# Altium PCB ROW.PcbDoc (part 3 of 3)
Units mm, origin at the board's own origin, x right, y up, seen from the top; angles counter-clockwise.
Board outline 176.65 x 110.9 mm, 2 copper layers (Top Layer, Bottom Layer); 156 components, 298 nets, 1223 pads, 409 vias.
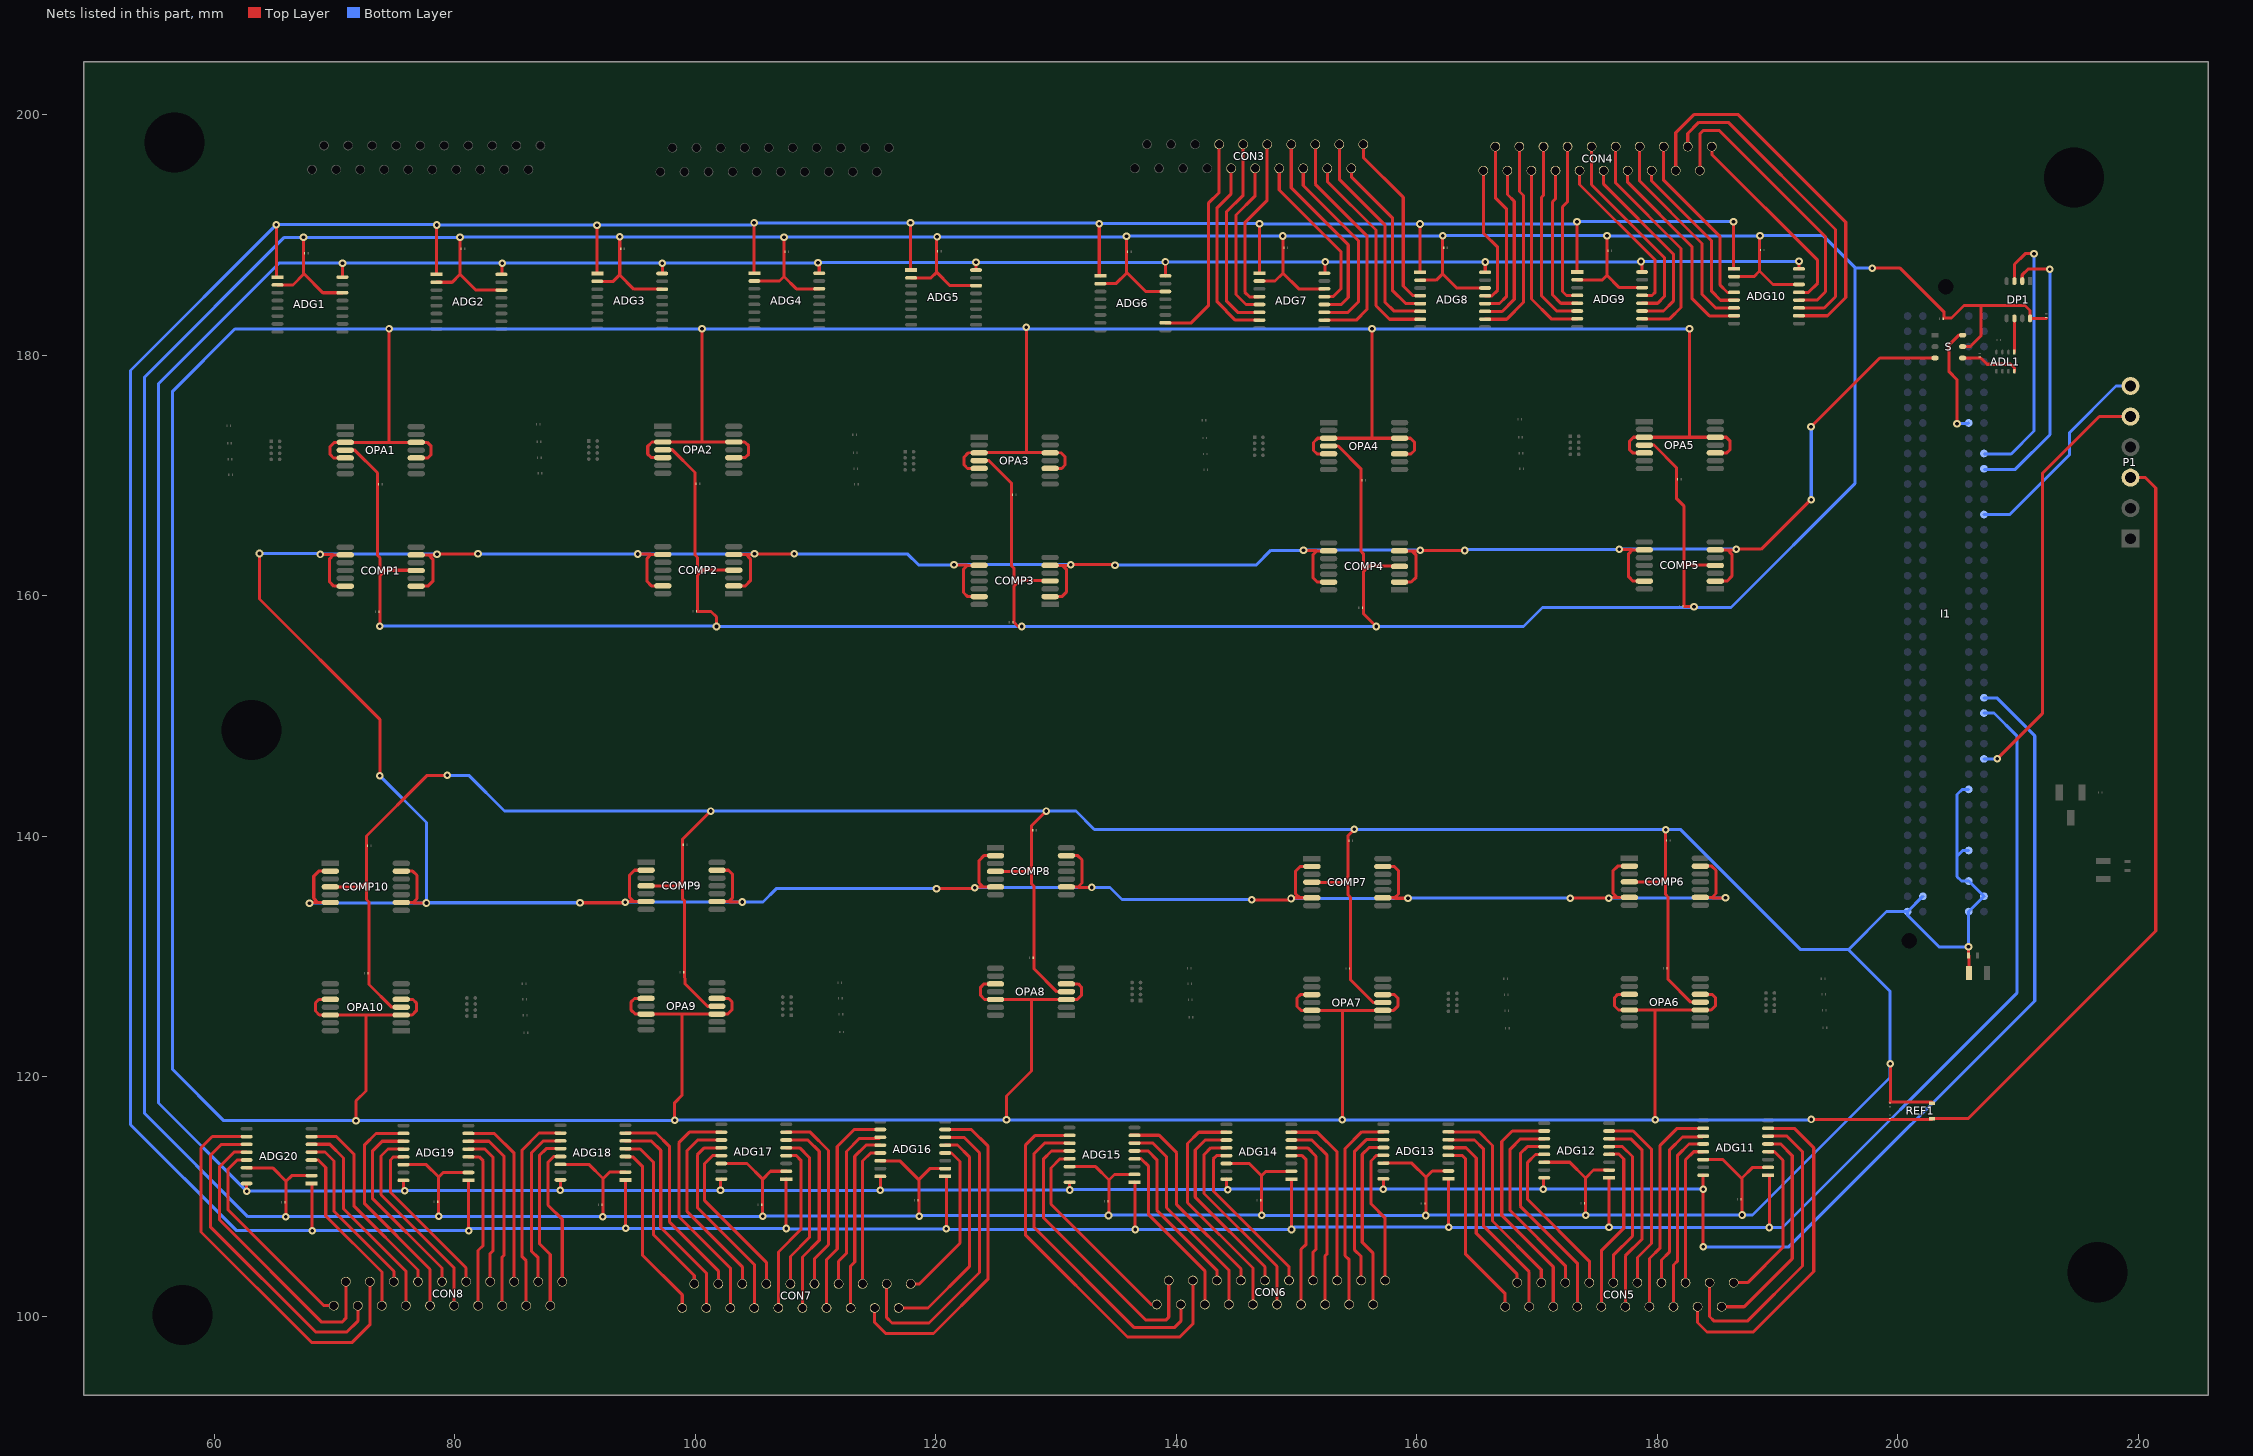
[diagram p3: the nets of this part, all layers, seen from the top]

## Via types
v1: diameter 0.635, hole 0.305, Top Layer to Bottom Layer, 409 vias

## Nets (pads, with @x,y where several pads share a name; then routed paths per layer and width w, separated by ;. In a path a pad name is that pad's centre, name@x,y a point inside that pad or via, vN(x,y) a via of type N, cw(c..) or ccw(c..) an arc to the next point about the centre after c; other vN are vias at no path point) (continued)
R48: ADG6.10 CON3.8 | length 18
  Top Layer w0.254: ADG6.10@139.084,182.684 141.248,182.684 142.664,184.1 142.664,192.622 143.555,193.513 CON3.8@143.555,197.525
R49: ADG7.7 CON3.9 | length 15.7
  Top Layer w0.254: CON3.9@144.555,195.525 144.555,193.422 143.391,192.258 143.391,184.424 144.909,182.906 ADG7.7@146.905,182.906
R50: ADG7.6 CON3.10 | length 16.7
  Top Layer w0.254: CON3.10@145.555,197.525 145.555,193.292 144.158,191.895 144.158,184.504 145.106,183.556 ADG7.6@146.905,183.556
R51: ADG7.5 CON3.11 | length 13.4
  Top Layer w0.254: CON3.11@146.555,195.525 146.555,193.241 144.966,191.652 144.966,185.029 145.789,184.206 ADG7.5@146.905,184.206
R52: ADG7.4 CON3.12 | length 14.5
  Top Layer w0.254: ADG7.4@146.905,184.856 146.876,184.827 146.097,184.827 145.693,185.231 145.693,191.006 147.555,192.868 CON3.12@147.555,197.525
R53: ADG7.13 CON3.13 | length 13.8
  Top Layer w0.254: CON3.13@148.555,195.525 148.555,193.734 153.689,188.6 153.689,185.514 153.031,184.856 ADG7.13@152.305,184.856
R54: ADG7.12 CON3.14 | length 16.9
  Top Layer w0.254: CON3.14@149.555,197.525 149.555,193.902 154.295,189.162 154.295,184.786 153.715,184.206 ADG7.12@152.305,184.206
R55: ADG7.11 CON3.15 | length 16.2
  Top Layer w0.254: CON3.15@150.555,195.525 150.555,194.104 155.143,189.516 155.143,184.423 154.276,183.556 ADG7.11@152.305,183.556
R56: ADG7.10 CON3.16 | length 19.4
  Top Layer w0.254: CON3.16@151.555,197.525 151.555,194.209 155.84,189.924 155.84,183.787 154.959,182.906 ADG7.10@152.305,182.906
R57: ADG8.7 CON3.17 | length 17.2
  Top Layer w0.254: CON3.17@152.555,195.525 152.555,194.442 156.604,190.393 156.604,184.106 157.73,182.98 ADG8.7@160.28,182.98
R58: ADG8.6 CON3.18 | length 18
  Top Layer w0.254: CON3.18@153.555,197.525 153.555,194.616 157.34,190.831 157.34,184.42 158.109,183.651 ADG8.6@160.28,183.651 ; ADG8.6@160.259,183.651 ADG8.6@160.28,183.63
R59: ADG8.5 CON3.19 | length 14.3
  Top Layer w0.254: CON3.19@154.555,195.525 154.555,194.825 157.96,191.42 157.96,185.39 159.049,184.301 160.259,184.301 ADG8.5@160.28,184.28
R60: ADG8.4 CON3.20 | length 14.9
  Top Layer w0.254: CON3.20@155.555,197.525 155.555,196.435 158.87,193.12 158.87,185.74 159.659,184.951 ADG8.4@160.28,184.951 ; ADG8.4@160.259,184.951 ADG8.4@160.28,184.93
R61: ADG8.13 CON4.1 | length 11.7
  Top Layer w0.254: CON4.1@165.532,195.338 165.532,190.158 166.72,188.97 166.72,185.4 166.25,184.93 ADG8.13@165.68,184.93
R62: ADG8.12 CON4.2 | length 14.9
  Top Layer w0.254: ADG8.12@165.68,184.28 166.87,184.28 167.44,184.85 167.44,192.17 166.532,193.078 CON4.2@166.532,197.338
R63: ADG8.11 CON4.3 | length 13.8
  Top Layer w0.254: ADG8.11@165.68,183.63 167.1,183.63 168.1,184.63 168.1,192.78 167.532,193.348 CON4.3@167.532,195.338
R64: ADG8.10 CON4.4 | length 16.9
  Top Layer w0.254: ADG8.10@165.68,182.98 167.47,182.98 168.87,184.38 168.87,193.27 168.532,193.608 CON4.4@168.532,197.338
R65: ADG9.7 CON4.5 | length 15.2
  Top Layer w0.254: CON4.5@169.532,195.338 169.532,184.658 171.18,183.01 ADG9.7@173.34,183.01
R66: ADG9.6 CON4.6 | length 16
  Top Layer w0.254: CON4.6@170.532,197.338 170.532,193.292 170.36,193.12 170.36,184.93 171.63,183.66 ADG9.6@173.34,183.66
R67: ADG9.5 CON4.7 | length 12.8
  Top Layer w0.254: CON4.7@171.532,195.338 171.532,192.992 171.28,192.74 171.28,185.01 171.98,184.31 ADG9.5@173.34,184.31
R68: ADG9.4 CON4.8 | length 13.6
  Top Layer w0.254: CON4.8@172.532,197.338 172.532,192.752 172.11,192.33 172.11,185.29 172.44,184.96 ADG9.4@173.34,184.96
R69: ADG9.13 CON4.9 | length 13.9
  Top Layer w0.254: CON4.9@173.532,195.338 173.532,194.188 179.82,187.9 179.82,185.22 179.56,184.96 ADG9.13@178.74,184.96
R70: ADG9.12 CON4.10 | length 17.1
  Top Layer w0.254: CON4.10@174.532,197.338 174.532,194.168 180.6,188.1 180.6,184.88 180.03,184.31 ADG9.12@178.74,184.31
R71: ADG9.11 CON4.11 | length 16.2
  Top Layer w0.254: CON4.11@175.532,195.338 175.532,194.208 181.33,188.41 181.33,184.48 180.51,183.66 ADG9.11@178.74,183.66
R72: ADG9.10 CON4.12 | length 19.3
  Top Layer w0.254: CON4.12@176.532,197.338 176.532,194.308 181.97,188.87 181.97,183.95 181.03,183.01 ADG9.10@178.74,183.01
R73: ADG10.7 CON4.13 | length 17.3
  Top Layer w0.254: CON4.13@177.532,195.338 177.532,194.368 182.87,189.03 182.87,184.72 184.33,183.26 ADG10.7@186.71,183.26
R74: ADG10.6 CON4.14 | length 17.9
  Top Layer w0.254: CON4.14@178.532,197.338 178.532,194.468 183.72,189.28 183.72,185.05 184.86,183.91 ADG10.6@186.71,183.91
R75: ADG10.5 CON4.15 | length 14.6
  Top Layer w0.254: CON4.15@179.532,195.338 179.532,194.478 184.52,189.49 184.52,185.3 185.26,184.56 ADG10.5@186.71,184.56
R76: ADG10.4 CON4.16 | length 15.2
  Top Layer w0.254: CON4.16@180.532,197.338 180.532,194.538 185.2,189.87 185.2,185.85 185.84,185.21 ADG10.4@186.71,185.21
R77: ADG10.10 CON4.17 | length 32.4
  Top Layer w0.254: CON4.17@181.532,195.338 181.532,198.492 183.032,199.992 186.728,199.992 195.67,191.05 195.67,184.78 194.16,183.27 ADG10.10@191.78,183.27
R78: ADG10.11 CON4.18 | length 26.4
  Top Layer w0.254: CON4.18@182.532,197.338 182.532,198.432 183.45,199.35 185.91,199.35 194.81,190.45 194.81,184.86 193.87,183.92 ADG10.11@191.78,183.92
R79: ADG10.12 CON4.19 | length 24.3
  Top Layer w0.254: CON4.19@183.532,195.338 183.532,198.392 183.81,198.67 185.16,198.67 193.98,189.85 193.98,185.27 193.28,184.57 ADG10.12@191.78,184.57
R80: ADG10.13 CON4.20 | length 16.9
  Top Layer w0.254: CON4.20@184.532,197.338 184.532,196.678 193.33,187.88 193.33,185.98 192.57,185.22 ADG10.13@191.78,185.22
R81: ADG11.4 CON5.1 | length 14.1
  Top Layer w0.254: CON5.1@186.345,102.85 187.513,102.85 190.454,105.791 190.454,113.03 189.743,113.741 ADG11.4@189.216,113.741
R82: ADG11.5 CON5.2 | length 18.5
  Top Layer w0.254: CON5.2@185.345,100.85 187.218,100.85 191.221,104.853 191.221,113.416 190.241,114.396 189.221,114.396 ADG11.5@189.216,114.391
R83: ADG11.6 CON5.3 | length 25.5
  Top Layer w0.254: CON5.3@184.345,102.85 184.345,100.041 184.736,99.65 187.48,99.65 192.067,104.237 192.067,113.754 190.78,115.041 ADG11.6@189.216,115.041
R84: ADG11.7 CON5.4 | length 28.1
  Top Layer w0.254: CON5.4@183.345,100.85 183.345,99.539 184.134,98.75 187.98,98.75 193.01,103.78 193.01,114.067 191.386,115.691 ADG11.7@189.216,115.691
R85: ADG11.13 CON5.5 | length 12
  Top Layer w0.254: CON5.5@182.345,102.85 182.345,113.065 183.021,113.741 ADG11.13@183.816,113.741
R86: ADG11.12 CON5.6 | length 15.3
  Top Layer w0.254: CON5.6@181.345,100.85 181.345,104.329 181.694,104.678 181.694,113.458 182.627,114.391 ADG11.12@183.816,114.391
R87: ADG11.11 CON5.7 | length 14.6
  Top Layer w0.254: CON5.7@180.345,102.85 180.345,104.732 181.003,105.39 181.003,113.87 182.094,114.961 183.736,114.961 ADG11.11@183.816,115.041
R88: ADG11.10 CON5.8 | length 18
  Top Layer w0.254: CON5.8@179.345,100.85 179.345,104.862 180.236,105.753 180.236,114.275 181.652,115.691 ADG11.10@183.816,115.691
R89: ADG12.7 CON5.9 | length 15.7
  Top Layer w0.254: ADG12.7@175.995,115.469 177.991,115.469 179.509,113.951 179.509,106.117 178.345,104.953 CON5.9@178.345,102.85
R90: ADG12.6 CON5.10 | length 16.7
  Top Layer w0.254: ADG12.6@175.995,114.819 177.794,114.819 178.742,113.871 178.742,106.48 177.345,105.083 CON5.10@177.345,100.85
R91: ADG12.5 CON5.11 | length 13.4
  Top Layer w0.254: ADG12.5@175.995,114.169 177.111,114.169 177.934,113.346 177.934,106.723 176.345,105.134 CON5.11@176.345,102.85
R92: ADG12.4 CON5.12 | length 14.5
  Top Layer w0.254: CON5.12@175.345,100.85 175.345,105.507 177.207,107.369 177.207,113.144 176.803,113.548 176.024,113.548 ADG12.4@175.995,113.519
R93: ADG12.13 CON5.13 | length 13.8
  Top Layer w0.254: ADG12.13@170.595,113.519 169.869,113.519 169.211,112.861 169.211,109.775 174.345,104.641 CON5.13@174.345,102.85
R94: ADG12.12 CON5.14 | length 16.9
  Top Layer w0.254: ADG12.12@170.595,114.169 169.185,114.169 168.605,113.589 168.605,109.213 173.345,104.473 CON5.14@173.345,100.85
R95: ADG12.11 CON5.15 | length 16.2
  Top Layer w0.254: ADG12.11@170.595,114.819 168.624,114.819 167.757,113.952 167.757,108.859 172.345,104.271 CON5.15@172.345,102.85
R96: ADG12.10 CON5.16 | length 19.4
  Top Layer w0.254: ADG12.10@170.595,115.469 167.941,115.469 167.06,114.588 167.06,108.451 171.345,104.166 CON5.16@171.345,100.85
R97: ADG13.7 CON5.17 | length 17.2
  Top Layer w0.254: ADG13.7@162.62,115.395 165.17,115.395 166.296,114.269 166.296,107.982 170.345,103.933 CON5.17@170.345,102.85
R98: ADG13.6 CON5.18 | length 18
  Top Layer w0.254: ADG13.6@162.62,114.724 164.791,114.724 165.56,113.955 165.56,107.544 169.345,103.759 CON5.18@169.345,100.85 ; ADG13.6@162.62,114.745 ADG13.6@162.641,114.724
R99: ADG13.5 CON5.19 | length 14.5
  Top Layer w0.254: ADG13.5@162.62,114.095 162.641,114.074 164.091,114.074 164.94,113.225 164.94,106.955 168.345,103.55 CON5.19@168.345,102.85
R100: ADG13.4 CON5.20 | length 15.2
  Top Layer w0.254: ADG13.4@162.62,113.424 163.781,113.424 164.03,113.175 164.03,105.255 167.345,101.94 CON5.20@167.345,100.85 ; ADG13.4@162.62,113.445 ADG13.4@162.641,113.424
R101: ADG13.13 CON6.1 | length 11.7
  Top Layer w0.254: ADG13.13@157.22,113.445 156.65,113.445 156.18,112.975 156.18,109.405 157.368,108.217 CON6.1@157.368,103.037
R102: ADG13.12 CON6.2 | length 14.9
  Top Layer w0.254: CON6.2@156.368,101.037 156.368,105.297 155.46,106.205 155.46,113.525 156.03,114.095 ADG13.12@157.22,114.095
R103: ADG13.11 CON6.3 | length 13.8
  Top Layer w0.254: CON6.3@155.368,103.037 155.368,105.027 154.8,105.595 154.8,113.745 155.8,114.745 ADG13.11@157.22,114.745
R104: ADG13.10 CON6.4 | length 16.9
  Top Layer w0.254: CON6.4@154.368,101.037 154.368,104.767 154.03,105.105 154.03,113.995 155.43,115.395 ADG13.10@157.22,115.395
R105: ADG14.7 CON6.5 | length 15.2
  Top Layer w0.254: ADG14.7@149.56,115.365 151.72,115.365 153.368,113.717 CON6.5@153.368,103.037
R106: ADG14.6 CON6.6 | length 16
  Top Layer w0.254: ADG14.6@149.56,114.715 151.27,114.715 152.54,113.445 152.54,105.255 152.368,105.083 CON6.6@152.368,101.037
R107: ADG14.5 CON6.7 | length 12.8
  Top Layer w0.254: ADG14.5@149.56,114.065 150.92,114.065 151.62,113.365 151.62,105.635 151.368,105.383 CON6.7@151.368,103.037
R108: ADG14.4 CON6.8 | length 13.6
  Top Layer w0.254: ADG14.4@149.56,113.415 150.46,113.415 150.79,113.085 150.79,106.045 150.368,105.623 CON6.8@150.368,101.037
R109: ADG14.13 CON6.9 | length 13.9
  Top Layer w0.254: ADG14.13@144.16,113.415 143.34,113.415 143.08,113.155 143.08,110.475 149.368,104.187 CON6.9@149.368,103.037
R110: ADG14.12 CON6.10 | length 17.1
  Top Layer w0.254: ADG14.12@144.16,114.065 142.87,114.065 142.3,113.495 142.3,110.275 148.368,104.207 CON6.10@148.368,101.037
R111: ADG14.11 CON6.11 | length 16.2
  Top Layer w0.254: ADG14.11@144.16,114.715 142.39,114.715 141.57,113.895 141.57,109.965 147.368,104.167 CON6.11@147.368,103.037
R112: ADG14.10 CON6.12 | length 19.3
  Top Layer w0.254: ADG14.10@144.16,115.365 141.87,115.365 140.93,114.425 140.93,109.505 146.368,104.067 CON6.12@146.368,101.037
R113: ADG15.7 CON6.13 | length 17.3
  Top Layer w0.254: ADG15.7@136.19,115.115 138.57,115.115 140.03,113.655 140.03,109.345 145.368,104.007 CON6.13@145.368,103.037
R114: ADG15.6 CON6.14 | length 17.9
  Top Layer w0.254: ADG15.6@136.19,114.465 138.04,114.465 139.18,113.325 139.18,109.095 144.368,103.907 CON6.14@144.368,101.037
R115: ADG15.5 CON6.15 | length 14.6
  Top Layer w0.254: ADG15.5@136.19,113.815 137.64,113.815 138.38,113.075 138.38,108.885 143.368,103.897 CON6.15@143.368,103.037
R116: ADG15.4 CON6.16 | length 15.2
  Top Layer w0.254: ADG15.4@136.19,113.165 137.06,113.165 137.7,112.525 137.7,108.505 142.368,103.837 CON6.16@142.368,101.037
R117: ADG15.10 CON6.17 | length 33
  Top Layer w0.254: ADG15.10@131.12,115.105 128.27,115.105 127.44,114.275 127.44,106.83 135.93,98.34 140.29,98.34 141.368,99.418 CON6.17@141.368,103.037
R118: ADG15.11 CON6.18 | length 26.7
  Top Layer w0.254: ADG15.11@131.12,114.455 129.03,114.455 128.16,113.585 128.16,107.46 136.51,99.11 139.83,99.11 140.368,99.648 CON6.18@140.368,101.037
R119: ADG15.12 CON6.19 | length 24.4
  Top Layer w0.254: ADG15.12@131.12,113.805 129.62,113.805 128.94,113.125 128.94,108.28 137.48,99.74 139.125,99.74 139.368,99.983 CON6.19@139.368,103.037
R120: ADG15.13 CON6.20 | length 17.1
  Top Layer w0.254: ADG15.13@131.12,113.155 130.33,113.155 129.57,112.395 129.57,109.38 137.913,101.037 CON6.20@138.368,101.037
R121: ADG16.4 CON7.1 | length 13.8
  Top Layer w0.254: CON7.1@117.905,102.75 118.625,102.75 122.014,106.139 122.014,112.93 121.303,113.641 ADG16.4@120.776,113.641
R122: ADG16.5 CON7.2 | length 18.8
  Top Layer w0.254: CON7.2@116.905,100.75 119.35,100.75 122.781,104.181 122.781,113.316 121.801,114.296 120.781,114.296 ADG16.5@120.776,114.291
R123: ADG16.6 CON7.3 | length 25.8
  Top Layer w0.254: CON7.3@115.905,102.75 115.905,99.941 116.346,99.5 119.43,99.5 123.627,103.697 123.627,113.654 122.34,114.941 ADG16.6@120.776,114.941
R124: ADG16.7 CON7.4 | length 28.1
  Top Layer w0.254: CON7.4@114.905,100.75 114.905,99.545 115.825,98.625 119.8,98.625 124.35,103.175 124.35,114.187 122.946,115.591 ADG16.7@120.776,115.591
R125: ADG16.13 CON7.5 | length 12
  Top Layer w0.254: CON7.5@113.905,102.75 113.905,112.965 114.581,113.641 ADG16.13@115.376,113.641
R126: ADG16.12 CON7.6 | length 15.3
  Top Layer w0.254: CON7.6@112.905,100.75 112.905,104.229 113.254,104.578 113.254,113.358 114.187,114.291 ADG16.12@115.376,114.291
R127: ADG16.11 CON7.7 | length 14.6
  Top Layer w0.254: CON7.7@111.905,102.75 111.905,104.632 112.563,105.29 112.563,113.77 113.654,114.861 115.296,114.861 ADG16.11@115.376,114.941
R128: ADG16.10 CON7.8 | length 18
  Top Layer w0.254: CON7.8@110.905,100.75 110.905,104.762 111.796,105.653 111.796,114.175 113.212,115.591 ADG16.10@115.376,115.591
R129: ADG17.7 CON7.9 | length 15.7
  Top Layer w0.254: ADG17.7@107.555,115.369 109.551,115.369 111.069,113.851 111.069,106.017 109.905,104.853 CON7.9@109.905,102.75
R130: ADG17.6 CON7.10 | length 16.7
  Top Layer w0.254: ADG17.6@107.555,114.719 109.354,114.719 110.302,113.771 110.302,106.38 108.905,104.983 CON7.10@108.905,100.75
R131: ADG17.5 CON7.11 | length 13.4
  Top Layer w0.254: ADG17.5@107.555,114.069 108.671,114.069 109.494,113.246 109.494,106.623 107.905,105.034 CON7.11@107.905,102.75
R132: ADG17.4 CON7.12 | length 14.5
  Top Layer w0.254: CON7.12@106.905,100.75 106.905,105.407 108.767,107.269 108.767,113.044 108.363,113.448 107.584,113.448 ADG17.4@107.555,113.419
R133: ADG17.13 CON7.13 | length 13.8
  Top Layer w0.254: ADG17.13@102.155,113.419 101.429,113.419 100.771,112.761 100.771,109.675 105.905,104.541 CON7.13@105.905,102.75
R134: ADG17.12 CON7.14 | length 16.9
  Top Layer w0.254: ADG17.12@102.155,114.069 100.745,114.069 100.165,113.489 100.165,109.113 104.905,104.373 CON7.14@104.905,100.75
R135: ADG17.11 CON7.15 | length 16.2
  Top Layer w0.254: ADG17.11@102.155,114.719 100.184,114.719 99.317,113.852 99.317,108.759 103.905,104.171 CON7.15@103.905,102.75
R136: ADG17.10 CON7.16 | length 19.4
  Top Layer w0.254: ADG17.10@102.155,115.369 99.501,115.369 98.62,114.488 98.62,108.351 102.905,104.066 CON7.16@102.905,100.75
R137: ADG18.7 CON7.17 | length 17.2
  Top Layer w0.254: ADG18.7@94.18,115.295 96.73,115.295 97.856,114.169 97.856,107.882 101.905,103.833 CON7.17@101.905,102.75
R138: ADG18.6 CON7.18 | length 18
  Top Layer w0.254: ADG18.6@94.18,114.624 96.351,114.624 97.12,113.855 97.12,107.444 100.905,103.659 CON7.18@100.905,100.75 ; ADG18.6@94.18,114.645 ADG18.6@94.201,114.624
R139: ADG18.5 CON7.19 | length 14.3
  Top Layer w0.254: ADG18.5@94.18,113.995 94.201,113.974 95.411,113.974 96.5,112.885 96.5,106.855 99.905,103.45 CON7.19@99.905,102.75
R140: ADG18.4 CON7.20 | length 14.9
  Top Layer w0.254: ADG18.4@94.18,113.324 94.801,113.324 95.59,112.535 95.59,105.155 98.905,101.84 CON7.20@98.905,100.75 ; ADG18.4@94.18,113.345 ADG18.4@94.201,113.324
R141: ADG18.13 CON8.1 | length 11.7
  Top Layer w0.254: ADG18.13@88.78,113.345 88.21,113.345 87.74,112.875 87.74,109.305 88.928,108.117 CON8.1@88.928,102.937
R142: ADG18.12 CON8.2 | length 14.9
  Top Layer w0.254: CON8.2@87.928,100.937 87.928,105.197 87.02,106.105 87.02,113.425 87.59,113.995 ADG18.12@88.78,113.995
R143: ADG18.11 CON8.3 | length 13.8
  Top Layer w0.254: CON8.3@86.928,102.937 86.928,104.927 86.36,105.495 86.36,113.645 87.36,114.645 ADG18.11@88.78,114.645
R144: ADG18.10 CON8.4 | length 16.9
  Top Layer w0.254: CON8.4@85.928,100.937 85.928,104.667 85.59,105.005 85.59,113.895 86.99,115.295 ADG18.10@88.78,115.295
R145: ADG19.7 CON8.5 | length 15.2
  Top Layer w0.254: ADG19.7@81.12,115.265 83.28,115.265 84.928,113.617 CON8.5@84.928,102.937
R146: ADG19.6 CON8.6 | length 16
  Top Layer w0.254: ADG19.6@81.12,114.615 82.83,114.615 84.1,113.345 84.1,105.155 83.928,104.983 CON8.6@83.928,100.937
R147: ADG19.5 CON8.7 | length 12.8
  Top Layer w0.254: ADG19.5@81.12,113.965 82.48,113.965 83.18,113.265 83.18,105.535 82.928,105.283 CON8.7@82.928,102.937
R148: ADG19.4 CON8.8 | length 13.6
  Top Layer w0.254: ADG19.4@81.12,113.315 82.02,113.315 82.35,112.985 82.35,105.945 81.928,105.523 CON8.8@81.928,100.937
R149: ADG19.13 CON8.9 | length 13.9
  Top Layer w0.254: ADG19.13@75.72,113.315 74.9,113.315 74.64,113.055 74.64,110.375 80.928,104.087 CON8.9@80.928,102.937
R150: ADG19.12 CON8.10 | length 17.1
  Top Layer w0.254: ADG19.12@75.72,113.965 74.43,113.965 73.86,113.395 73.86,110.175 79.928,104.107 CON8.10@79.928,100.937
R151: ADG19.11 CON8.11 | length 16.2
  Top Layer w0.254: ADG19.11@75.72,114.615 73.95,114.615 73.13,113.795 73.13,109.865 78.928,104.067 CON8.11@78.928,102.937
R152: ADG19.10 CON8.12 | length 19.3
  Top Layer w0.254: ADG19.10@75.72,115.265 73.43,115.265 72.49,114.325 72.49,109.405 77.928,103.967 CON8.12@77.928,100.937
R153: ADG20.7 CON8.13 | length 17.3
  Top Layer w0.254: ADG20.7@67.75,115.015 70.13,115.015 71.59,113.555 71.59,109.245 76.928,103.907 CON8.13@76.928,102.937
R154: ADG20.6 CON8.14 | length 17.9
  Top Layer w0.254: ADG20.6@67.75,114.365 69.6,114.365 70.74,113.225 70.74,108.995 75.928,103.807 CON8.14@75.928,100.937
R155: ADG20.5 CON8.15 | length 14.6
  Top Layer w0.254: ADG20.5@67.75,113.715 69.2,113.715 69.94,112.975 69.94,108.785 74.928,103.797 CON8.15@74.928,102.937
R156: ADG20.4 CON8.16 | length 15.2
  Top Layer w0.254: ADG20.4@67.75,113.065 68.62,113.065 69.26,112.425 69.26,108.405 73.928,103.737 CON8.16@73.928,100.937
R157: ADG20.10 CON8.17 | length 33.2
  Top Layer w0.254: ADG20.10@62.68,115.005 59.83,115.005 58.89,114.065 58.89,107.07 68.07,97.89 71.47,97.89 72.928,99.348 CON8.17@72.928,102.937
R158: ADG20.11 CON8.18 | length 26.9
  Top Layer w0.254: ADG20.11@62.68,114.355 60.59,114.355 59.66,113.425 59.66,107.5 68.4,98.76 71.03,98.76 71.928,99.658 CON8.18@71.928,100.937
R159: ADG20.12 CON8.19 | length 24.4
  Top Layer w0.254: ADG20.12@62.68,113.705 61.625,113.705 60.43,112.51 60.43,108.06 68.92,99.57 70.615,99.57 70.928,99.883 CON8.19@70.928,102.937
R160: ADG20.13 CON8.20 | length 17.3
  Top Layer w0.254: ADG20.13@62.68,113.055 61.89,113.055 61.13,112.295 61.13,108.92 69.113,100.937 CON8.20@69.928,100.937
R\E\S\E\T\: I1.c14 P1.6 | length 17.7
  Bottom Layer w0.254: I1.c14@207.165,166.735 209.31,166.735 214.275,171.7 214.275,173.55 218.15,177.425 P1.6@219.35,177.425
SCL_DP: DP1.2 I1.c11 | length 23.4
  Top Layer w0.254: DP1.2@210.35,186.15 210.35,186.675 210.82,187.145 v1(212.65,187.145)
  Bottom Layer w0.254: I1.c11@207.21,170.5 209.775,170.5 212.65,173.375 v1(212.65,187.145)
SCLK_COL: I1.c30 P1.5 | length 35.7
  Top Layer w0.254: v1(208.275,146.425) 212.025,150.175 212.025,170.15 216.76,174.885 P1.5@219.35,174.885
  Bottom Layer w0.254: I1.c30@207.165,146.415 208.265,146.415 v1(208.275,146.425)
SDA: DP1.3 I1.c10 | length 23.1
  Top Layer w0.254: DP1.3@209.7,186.15 209.7,187.545 210.59,188.435 v1(211.33,188.435)
  Bottom Layer w0.254: I1.c10@207.205,171.775 209.425,171.775 211.33,173.68 v1(211.33,188.435)
SEL0: ADG1.1 ADG2.1 ADG3.1 ADG4.1 ADG5.1 ADG6.1 ADG7.1 ADG8.1 ADG9.1 ADG10.1 ADG11.1 ADG12.1 ADG13.1 ADG14.1 ADG15.1 ADG16.1 ADG17.1 ADG18.1 ADG19.1 ADG20.1 I1.c27 | length 477.3
  Top Layer w0.254: v1(65.146,190.831) 65.146,186.582 ADG1.1@65.244,186.484 ; ADG20.1@68.08,111.105 68.13,111.055 v1(68.13,107.175) ; ADG2.1@78.465,186.706 78.476,186.717 v1(78.476,190.816) ; v1(81.14,107.175) ADG19.1@81.14,111.345 ; v1(91.82,190.8) 91.82,186.8 ADG3.1@91.84,186.78 ; ADG18.1@94.18,111.395 94.2,111.375 v1(94.2,107.375) ; ADG4.1@104.88,186.83 v1(104.88,191) ; v1(107.544,107.359) 107.544,111.458 ADG17.1@107.555,111.469 ; v1(117.89,191) 117.89,187.12 ADG5.1@117.94,187.07 ; ADG16.1@120.776,111.691 120.874,111.593 v1(120.874,107.344) ; v1(133.586,190.931) 133.586,186.682 ADG6.1@133.684,186.584 ; ADG15.1@136.52,111.205 136.57,111.155 v1(136.57,107.275) ; ADG7.1@146.905,186.806 146.916,186.817 v1(146.916,190.916) ; v1(149.58,107.275) ADG14.1@149.58,111.445 ; v1(160.26,190.9) 160.26,186.9 ADG8.1@160.28,186.88 ; ADG13.1@162.62,111.495 162.64,111.475 v1(162.64,107.475) ; ADG9.1@173.32,186.93 v1(173.32,191.1) ; v1(175.984,107.459) 175.984,111.558 ADG12.1@175.995,111.569 ; v1(186.33,191.1) 186.33,187.22 ADG10.1@186.38,187.17 ; ADG11.1@189.216,111.791 189.314,111.693 v1(189.314,107.444)
  Bottom Layer w0.254: v1@120.762,107.327 107.576,107.327 v1(107.544,107.359) v1@94.204,107.359 ; v1@120.943,107.275 v1(136.57,107.275) v1(149.58,107.275) 149.78,107.475 v1(162.64,107.475) v1@162.64,107.459 ; v1@133.517,191 v1(117.89,191) v1(104.88,191) 104.68,190.8 v1(91.82,190.8) v1@91.82,190.816 ; v1@133.698,190.948 146.884,190.948 v1(146.916,190.916) v1@160.256,190.916 ; v1(186.33,191.1) v1(173.32,191.1) 173.12,190.9 v1(160.26,190.9) v1@160.26,190.916 ; I1.c27@207.165,150.225 208,150.225 209.93,148.295 209.93,126.97 190.404,107.444 v1(189.314,107.444) 189.219,107.444 189.202,107.427 176.016,107.427 v1(175.984,107.459) v1@162.644,107.459 ; v1@91.816,190.816 91.82,190.82 v1@91.82,190.816 ; v1@91.816,190.816 v1(78.476,190.816) 78.444,190.848 65.258,190.848 65.241,190.831 v1(65.146,190.831) 53.025,178.71 53.025,116 61.85,107.175 v1(68.13,107.175) v1(81.14,107.175) 81.34,107.375 v1(94.2,107.375) v1@94.2,107.359 ; v1@91.816,190.816 v1@91.82,190.816 ; v1@94.2,107.359 94.2,107.355 v1@94.204,107.359 ; v1@94.2,107.359 v1@94.204,107.359 ; v1@160.256,190.916 v1@160.26,190.916 ; v1@160.256,190.916 160.26,190.92 v1@160.26,190.916 ; v1@162.64,107.459 v1@162.644,107.459 ; v1@162.64,107.459 162.64,107.455 v1@162.644,107.459
SEL1: ADG1.16 ADG2.16 ADG3.16 ADG4.16 ADG5.16 ADG6.16 ADG7.16 ADG8.16 ADG9.16 ADG10.16 ADG11.16 ADG12.16 ADG13.16 ADG14.16 ADG15.16 ADG16.16 ADG17.16 ADG18.16 ADG19.16 ADG20.16 I1.c26 | length 419.5
  Top Layer w0.254: v1(62.68,110.465) ADG20.16@62.68,111.105 ; ADG1.16@70.644,186.484 70.644,187.639 v1(70.65,187.645) ; ADG19.16@75.72,111.365 75.72,110.595 v1(75.82,110.495) ; ADG2.16@83.865,186.706 83.934,186.775 v1(83.934,187.645) ; v1(88.77,110.535) 88.77,111.385 ADG18.16@88.78,111.395 ; ADG3.16@97.24,186.78 97.25,186.79 v1(97.25,187.64) ; v1(102.086,110.53) 102.086,111.4 ADG17.16@102.155,111.469 ; v1(110.2,187.68) 110.3,187.58 ADG4.16@110.3,186.81 ; v1(115.37,110.53) 115.376,110.536 ADG16.16@115.376,111.691 ; ADG5.16@123.34,187.07 v1(123.34,187.71) ; v1(131.12,110.565) ADG15.16@131.12,111.205 ; ADG6.16@139.084,186.584 139.084,187.739 v1(139.09,187.745) ; ADG14.16@144.16,111.465 144.16,110.695 v1(144.26,110.595) ; ADG7.16@152.305,186.806 152.374,186.875 v1(152.374,187.745) ; v1(157.21,110.635) 157.21,111.485 ADG13.16@157.22,111.495 ; ADG8.16@165.68,186.88 165.69,186.89 v1(165.69,187.74) ; v1(170.526,110.63) 170.526,111.5 ADG12.16@170.595,111.569 ; v1(178.64,187.78) 178.74,187.68 ADG9.16@178.74,186.91 ; v1(183.81,105.83) v1(183.81,110.63) 183.816,110.636 ADG11.16@183.816,111.791 ; ADG10.16@191.78,187.17 v1(191.78,187.81)
  Bottom Layer w0.254: v1@75.69,110.535 v1(88.77,110.535) v1@88.775,110.53 ; v1(75.82,110.495) 62.71,110.495 v1(62.68,110.465) 55.35,117.795 55.35,177.625 65.37,187.645 v1(70.65,187.645) v1(83.934,187.645) v1@97.155,187.645 ; v1@88.77,110.53 v1@88.775,110.53 ; v1@97.25,187.645 v1@97.245,187.645 ; v1(110.2,187.68) 123.31,187.68 v1(123.34,187.71) v1@139.055,187.71 ; v1@110.33,187.64 v1(97.25,187.64) v1@97.245,187.645 ; v1(115.37,110.53) v1(102.086,110.53) v1@88.865,110.53 ; v1@115.405,110.565 v1(131.12,110.565) 131.15,110.595 v1(144.26,110.595) ; v1(139.09,187.745) v1(152.374,187.745) v1@165.595,187.745 ; v1@144.13,110.635 v1(157.21,110.635) v1@157.215,110.63 ; v1@157.21,110.63 v1@157.215,110.63 ; v1@165.69,187.745 v1@165.685,187.745 ; v1(178.64,187.78) 191.75,187.78 v1(191.78,187.81) ; v1@178.77,187.74 v1(165.69,187.74) v1@165.685,187.745 ; v1(183.81,105.83) 190.94,105.83 211.39,126.28 211.39,148.335 208.23,151.495 I1.c26@207.165,151.495 ; v1(183.81,110.63) v1(170.526,110.63) v1@157.305,110.63 ; v1@88.775,110.53 88.81,110.495 88.83,110.495 v1@88.865,110.53 ; v1@88.775,110.53 v1@88.865,110.53 ; v1@97.155,187.645 97.19,187.68 97.21,187.68 v1@97.245,187.645 ; v1@97.155,187.645 v1@97.245,187.645 ; v1@157.215,110.63 v1@157.305,110.63 ; v1@157.215,110.63 157.25,110.595 157.27,110.595 v1@157.305,110.63 ; v1@165.595,187.745 v1@165.685,187.745 ; v1@165.595,187.745 165.63,187.78 165.65,187.78 v1@165.685,187.745
SPDT: I1.d8 S.6 | length 9.3
  Top Layer w0.254: v1(204.925,174.3) 204.925,177.95 204.275,178.6 204.275,180.85 205.08,181.655 S.6@205.395,181.655
  Bottom Layer w0.254: v1(204.925,174.3) 205.84,174.3 I1.d8@205.895,174.355
VAR_R: ADL1.1 DP1.6 | length 2.8
  Top Layer w0.254: ADL1.1@209.7,180.25 DP1.6@209.7,183.05
VCC: ADG1.2 ADG1.14 ADG2.2 ADG2.14 ADG3.2 ADG3.14 ADG4.2 ADG4.14 ADG5.2 ADG5.14 ADG6.2 ADG6.14 ADG7.2 ADG7.14 ADG8.2 ADG8.14 ADG9.2 ADG9.14 ADG10.2 ADG10.14 ADG11.2 ADG11.14 ADG12.2 ADG12.14 ADG13.2 ADG13.14 ADG14.2 ADG14.14 ADG15.2 ADG15.14 ADG16.2 ADG16.14 ADG17.2 ADG17.14 ADG18.2 ADG18.14 ADG19.2 ADG19.14 ADG20.2 ADG20.14 C1.1 C2.1 C3.1 C4.1 C5.1 C6.1 C7.1 C8.1 C9.1 C10.1 C31.2 C32.2 C33.2 C34.2 C35.2 C36.2 C37.2 C38.2 C39.2 C40.2 C43.2 C44.2 C45.2 C47.2 C48.2 C51.1 C52.1 C53.1 C54.1 C55.1 C56.1 C57.1 C58.1 C59.1 C60.1 C81.2 C82.2 C83.2 C84.2 C85.2 C86.2 C87.2 C88.2 C89.2 C90.2 COMP1.4 COMP2.4 COMP3.4 COMP4.4 COMP5.4 COMP6.4 COMP7.4 COMP8.4 COMP9.4 COMP10.4 DP1.8 I1.c39 I1.d32 I1.d36 I1.d38 I1.d40 I1.g39 I1.h40 OPA1.4 OPA2.4 OPA3.4 OPA4.4 OPA5.4 OPA6.4 OPA7.4 OPA8.4 OPA9.4 OPA10.4 REF1.1 S.5 | length 1099.8
  Top Layer w0.254: ADG20.14@62.68,112.405 64.844,112.405 65.957,111.292 ; ADG1.2@65.244,185.834 66.531,185.834 67.412,186.715 v1(67.412,189.792) ; v1(65.92,108.345) 65.957,108.382 65.957,111.292 ; 67.448,186.751 69.015,185.184 ADG1.14@70.644,185.184 ; ADG20.2@68.08,111.755 66.42,111.755 65.957,111.292 ; COMP10.4@69.64,135.775 69.64,135.751 72.185,135.751 72.65,136.215 ; OPA1.4@70.884,172.093 71.677,172.093 73.562,170.208 73.57,169.259 73.57,163.34 73.77,163.14 73.77,161.64 ; v1(73.75,157.45) 73.77,157.47 73.77,161.64 ; OPA10.4@75.536,125.762 74.743,125.762 72.858,127.647 72.85,128.596 72.85,134.515 72.65,134.715 72.65,140 77.7,145.05 v1(79.35,145.05) ; ADG19.14@75.72,112.665 77.624,112.665 78.647,111.642 ; COMP1.4@76.78,162.08 76.78,162.104 74.234,162.104 73.77,161.64 ; ADG2.2@78.465,186.056 79.766,186.056 80.425,186.715 ; 78.647,109.595 78.647,111.642 ; v1(78.65,108.365) 78.65,109.572 ; v1(80.421,189.807) 80.428,189.8 80.428,186.712 81.734,185.406 ADG2.14@83.865,185.406 ; ADG19.2@81.12,112.015 79.02,112.015 78.647,111.642 ; ADG18.14@88.78,112.695 91.14,112.695 92.32,111.515 ; ADG3.2@91.84,186.13 93.17,186.13 93.71,186.67 93.71,189.82 v1(93.72,189.83) ; v1(92.3,108.345) 92.31,108.355 92.31,111.505 92.85,112.045 ADG18.2@94.18,112.045 ; 93.7,186.66 94.88,185.48 ADG3.14@97.24,185.48 ; COMP9.4@95.9,135.855 95.9,135.831 98.446,135.831 98.91,136.295 ; OPA2.4@97.294,172.123 98.087,172.123 99.972,170.238 99.98,169.289 99.98,163.37 100.18,163.17 100.18,161.67 ; v1(101.275,142.075) 98.91,139.71 98.91,134.795 99.11,134.595 99.11,128.676 99.118,127.727 101.003,125.842 OPA9.4@101.796,125.842 ; v1(101.75,157.425) 101.75,158.225 101.305,158.67 100.18,158.67 100.18,161.67 ; ADG17.14@102.155,112.769 104.286,112.769 105.592,111.463 105.592,108.375 v1(105.599,108.368) ; COMP2.4@103.19,162.11 103.19,162.134 100.645,162.134 100.18,161.67 ; ADG4.2@104.9,186.16 107,186.16 107.373,186.533 ; 105.595,111.46 106.254,112.119 ADG17.2@107.555,112.119 ; 107.37,188.603 v1(107.37,189.81) ; 107.373,188.58 107.373,186.533 ; ADG4.14@110.3,185.51 108.396,185.51 107.373,186.533 ; ADG16.14@115.376,112.991 117.005,112.991 118.572,111.424 ; ADG5.2@117.94,186.42 119.6,186.42 120.063,186.883 ; v1(118.608,108.383) 118.608,111.46 119.489,112.341 ADG16.2@120.776,112.341 ; v1(120.1,189.83) 120.063,189.793 120.063,186.883 ; ADG5.14@123.34,185.77 121.176,185.77 120.063,186.883 ; OPA3.4@123.604,171.223 124.397,171.223 126.282,169.338 126.29,168.389 126.29,162.47 126.49,162.27 126.49,160.77 ; COMP8.4@124.96,137.065 124.96,137.04 127.506,137.04 127.97,137.505 ; v1(127.15,157.425) 126.835,157.425 126.49,157.77 126.49,160.77 ; v1(129.175,142.075) 127.97,140.87 127.97,136.005 128.17,135.805 128.17,129.886 128.178,128.937 130.063,127.052 OPA8.4@130.856,127.052 ; COMP3.4@129.5,161.21 129.5,161.235 126.954,161.235 126.49,160.77 ; ADG15.14@131.12,112.505 133.284,112.505 134.397,111.392 ; ADG6.2@133.684,185.934 134.971,185.934 135.852,186.815 v1(135.852,189.892) ; v1(134.36,108.445) 134.397,108.482 134.397,111.392 ; 135.888,186.851 137.455,185.284 ADG6.14@139.084,185.284 ; ADG15.2@136.52,111.855 134.86,111.855 134.397,111.392 ; ADG14.14@144.16,112.765 146.064,112.765 147.087,111.742 ; ADG7.2@146.905,186.156 148.206,186.156 148.865,186.815 ; 147.087,109.695 147.087,111.742 ; v1(147.09,108.465) 147.09,109.672 ; v1(148.861,189.907) 148.868,189.9 148.868,186.812 150.174,185.506 ADG7.14@152.305,185.506 ; ADG14.2@149.56,112.115 147.46,112.115 147.087,111.742 ; COMP7.4@151.27,136.165 151.27,136.14 153.815,136.14 154.28,136.605 ; OPA4.4@152.664,172.433 153.457,172.433 155.342,170.548 155.35,169.599 155.35,163.68 155.55,163.48 155.55,161.98 ; v1(154.8,140.55) 154.28,140.03 154.28,135.105 154.48,134.905 154.48,128.986 154.488,128.037 156.373,126.152 OPA7.4@157.166,126.152 ; v1(156.625,157.425) 155.55,158.5 155.55,161.98 ; ADG13.14@157.22,112.795 159.58,112.795 160.76,111.615 ; COMP4.4@158.56,162.42 158.56,162.444 156.014,162.444 155.55,161.98 ; ADG8.2@160.28,186.23 161.61,186.23 162.15,186.77 162.15,189.92 v1(162.16,189.93) ; v1(160.74,108.445) 160.75,108.455 160.75,111.605 161.29,112.145 ADG13.2@162.62,112.145 ; 162.14,186.76 163.32,185.58 ADG8.14@165.68,185.58 ; ADG12.14@170.595,112.869 172.726,112.869 174.032,111.563 174.032,108.475 v1(174.039,108.468) ; ADG9.2@173.34,186.26 175.44,186.26 175.813,186.633 ; 174.035,111.56 174.694,112.219 ADG12.2@175.995,112.219 ; 175.81,188.703 v1(175.81,189.91) ; 175.813,188.68 175.813,186.633 ; COMP6.4@177.68,136.195 177.68,136.17 180.225,136.17 180.69,136.635 ; ADG9.14@178.74,185.61 176.836,185.61 175.813,186.633 ; OPA5.4@178.924,172.513 179.717,172.513 181.602,170.628 181.61,169.679 181.61,168.04 182.23,167.42 182.23,159.075 v1(183.05,159.075) ; v1(180.7,140.525) 180.69,140.515 180.69,136.635 ; 182.23,162.524 184.82,162.524 COMP5.4@184.82,162.5 ; OPA6.4@183.576,126.182 182.783,126.182 180.898,128.067 180.89,129.016 180.89,134.935 180.69,135.135 180.69,136.635 ; ADG11.14@183.816,113.091 185.445,113.091 187.012,111.524 ; ADG10.2@186.38,186.52 188.04,186.52 188.503,186.983 ; v1(187.048,108.483) 187.048,111.56 187.929,112.441 ADG11.2@189.216,112.441 ; v1(188.54,189.93) 188.503,189.893 188.503,186.983 ; ADG10.14@191.78,185.87 189.616,185.87 188.503,186.983 ; v1(197.875,187.225) 200.2,187.225 203.86,183.565 203.86,183.075 204.46,183.075 205.51,184.125 206.925,184.125 ; 199.35,117.87 REF1.1@202.825,117.87 ; 199.38,117.89 v1(199.38,121.06) ; S.5@205.395,180.705 206.03,180.705 206.925,181.6 206.925,184.125 ; v1(205.88,130.78) 205.88,130.37 205.87,130.36 205.87,130.095 C47.2@205.885,130.08 205.92,130.045 C48.2@205.92,128.61 ; 212.35,183.05 DP1.8@211,183.05 211,183.705 210.58,184.125 206.925,184.125
  Bottom Layer w0.254: v1(73.75,157.45) 101.725,157.45 v1(101.75,157.425) v1(127.15,157.425) v1(156.625,157.425) 168.875,157.425 170.45,159 186.125,159 196.425,169.3 196.425,187.3 193.795,189.93 v1(188.54,189.93) 188.52,189.91 v1(175.81,189.91) 175.78,189.93 v1(162.16,189.93) 162.137,189.907 v1(148.861,189.907) 148.876,189.892 v1(135.852,189.892) ; v1(79.35,145.05) 81.15,145.05 84.125,142.075 v1(129.175,142.075) 131.65,142.075 133.175,140.55 v1(154.8,140.55) 180.675,140.55 v1(180.7,140.525) 181.95,140.525 191.925,130.55 195.9,130.55 ; v1(118.608,108.383) 105.584,108.383 v1(105.599,108.368) 92.323,108.368 v1(92.3,108.345) 78.68,108.345 v1(78.65,108.365) 65.94,108.365 v1(65.92,108.345) 62.78,108.345 54.2,116.925 54.2,178.175 65.817,189.792 v1(67.412,189.792) 80.436,189.792 v1(80.421,189.807) 93.697,189.807 v1(93.72,189.83) 107.34,189.83 v1(107.37,189.81) 120.08,189.81 v1(120.1,189.83) v1@135.79,189.83 ; v1@118.67,108.445 v1(134.36,108.445) 134.38,108.465 v1(147.09,108.465) 147.12,108.445 v1(160.74,108.445) 160.763,108.468 v1(174.039,108.468) 174.024,108.483 v1(187.048,108.483) 187.913,108.483 199.35,119.92 199.35,127.1 195.9,130.55 ; 196.5,187.225 v1(197.875,187.225) ; I1.g39@202.085,134.985 I1.h40@200.815,133.715 ; I1.d40@205.88,133.7 v1(205.88,130.78) 203.42,130.78 200.815,133.385 I1.h40@200.815,133.715 ; I1.d40@205.895,133.7 I1.d40@205.895,133.715 I1.c39@207.165,134.985 I1.d38@205.895,136.255 205.295,136.255 204.925,136.625 204.925,138.325 ; I1.d36@205.895,138.795 205.395,138.795 204.925,138.325 ; I1.d32@205.895,143.875 205.35,143.875 204.925,143.45 204.925,138.325 ; 195.9,130.55 199.065,133.715 I1.h40@200.815,133.715
VCOM: C46.2 OPA1.3 OPA1.5 OPA1.10 OPA1.12 OPA2.3 OPA2.5 OPA2.10 OPA2.12 OPA3.3 OPA3.5 OPA3.10 OPA3.12 OPA4.3 OPA4.5 OPA4.10 OPA4.12 OPA5.3 OPA5.5 OPA5.10 OPA5.12 OPA6.3 OPA6.5 OPA6.10 OPA6.12 OPA7.3 OPA7.5 OPA7.10 OPA7.12 OPA8.3 OPA8.5 OPA8.10 OPA8.12 OPA9.3 OPA9.5 OPA9.10 OPA9.12 OPA10.3 OPA10.5 OPA10.10 OPA10.12 P1.3 REF1.2 | length 619.4
  Top Layer w0.254: OPA10.10@69.636,126.412 68.681,126.412 68.4,126.131 68.4,125.44 68.728,125.112 OPA10.12@69.636,125.112 OPA10.3@75.536,125.112 76.442,125.112 76.791,125.461 76.791,126.131 76.51,126.412 OPA10.5@75.536,126.412 ; OPA1.5@70.884,171.443 69.91,171.443 69.629,171.724 69.629,172.394 69.978,172.743 OPA1.3@70.884,172.743 74.525,172.743 ; v1(71.775,116.325) 71.775,117.975 72.6,118.8 72.6,125.125 ; v1(74.525,182.175) 74.525,172.743 ; OPA1.10@76.784,171.443 77.739,171.443 78.02,171.724 78.02,172.415 77.692,172.743 OPA1.12@76.784,172.743 74.525,172.743 ; OPA9.10@95.896,126.492 94.941,126.492 94.66,126.211 94.66,125.52 94.988,125.192 OPA9.12@95.896,125.192 OPA9.3@101.796,125.192 102.702,125.192 103.051,125.541 103.051,126.211 102.77,126.492 OPA9.5@101.796,126.492 ; OPA2.5@97.294,171.473 96.32,171.473 96.039,171.754 96.039,172.424 96.388,172.773 OPA2.3@97.294,172.773 OPA2.12@103.194,172.773 104.102,172.773 104.43,172.445 104.43,171.754 104.149,171.473 OPA2.10@103.194,171.473 ; v1(98.275,116.35) 98.275,117.825 98.875,118.425 98.875,125.175 ; 100.55,172.823 v1(100.55,182.175) ; OPA3.5@123.604,170.573 122.63,170.573 122.349,170.854 122.349,171.524 122.698,171.873 123.629,171.898 129.529,171.898 130.412,171.873 130.74,171.545 130.74,170.854 130.459,170.573 OPA3.10@129.504,170.573 ; OPA8.10@124.956,127.702 124.001,127.702 123.72,127.421 123.72,126.73 124.048,126.402 OPA8.12@124.956,126.402 OPA8.3@130.856,126.402 131.762,126.402 132.111,126.751 132.111,127.421 131.83,127.702 OPA8.5@130.856,127.702 ; v1(125.875,116.4) 125.875,118.375 127.95,120.45 127.95,126.402 ; 127.525,171.923 v1(127.525,182.325) ; OPA7.10@151.266,126.802 150.311,126.802 150.03,126.521 150.03,125.83 150.358,125.502 OPA7.12@151.266,125.502 OPA7.3@157.166,125.502 158.072,125.502 158.421,125.851 158.421,126.521 158.14,126.802 OPA7.5@157.166,126.802 ; OPA4.5@152.664,171.783 151.69,171.783 151.409,172.064 151.409,172.734 151.758,173.083 OPA4.3@152.664,173.083 156.275,173.083 ; v1(153.8,116.4) 153.8,125.502 ; v1(156.275,182.175) 156.275,173.083 ; OPA4.10@158.564,171.783 159.519,171.783 159.8,172.064 159.8,172.755 159.472,173.083 OPA4.12@158.564,173.083 156.275,173.083 ; OPA6.10@177.676,126.832 176.721,126.832 176.44,126.551 176.44,125.86 176.768,125.532 OPA6.12@177.676,125.532 179.8,125.532 ; OPA5.5@178.924,171.863 177.95,171.863 177.669,172.144 177.669,172.814 178.018,173.163 OPA5.3@178.924,173.163 OPA5.12@184.824,173.163 185.732,173.163 186.06,172.835 186.06,172.144 185.779,171.863 OPA5.10@184.824,171.863 ; v1(179.825,116.4) 179.8,116.425 179.8,125.532 ; 182.675,173.213 v1(182.675,182.175) ; OPA6.5@183.576,126.832 184.55,126.832 184.831,126.551 184.831,125.881 184.482,125.532 OPA6.3@183.576,125.532 179.8,125.532 ; v1(192.8,116.43) REF1.2@202.825,116.43 ; REF1.2@202.825,116.49 205.84,116.49 221.45,132.1 221.45,168.95 220.595,169.805 P1.3@219.35,169.805
  Bottom Layer w0.254: v1(182.675,182.175) v1(156.275,182.175) v1(100.55,182.175) v1(74.525,182.175) 61.7,182.175 56.525,177 56.525,120.575 60.775,116.325 v1(71.775,116.325) 71.8,116.35 v1(98.275,116.35) 98.275,116.4 v1(125.875,116.4) v1(153.8,116.4) v1(179.825,116.4) 192.77,116.4 v1(192.8,116.43)
VRAMP: COMP1.2 COMP1.6 COMP1.9 COMP1.13 COMP2.2 COMP2.6 COMP2.9 COMP2.13 COMP3.2 COMP3.6 COMP3.9 COMP3.13 COMP4.2 COMP4.6 COMP4.9 COMP4.13 COMP5.2 COMP5.6 COMP5.9 COMP5.13 COMP6.2 COMP6.6 COMP6.9 COMP6.13 COMP7.2 COMP7.6 COMP7.9 COMP7.13 COMP8.2 COMP8.6 COMP8.9 COMP8.13 COMP9.2 COMP9.6 COMP9.9 COMP9.13 COMP10.2 COMP10.6 COMP10.9 COMP10.13 S.3 | length 418.8
  Top Layer w0.254: v1(63.75,163.5) 63.75,159.71 73.76,149.7 v1(73.76,145) ; v1(67.91,134.415) 67.97,134.475 68.62,134.475 ; v1(68.79,163.42) 69.86,163.42 ; COMP10.6@69.64,134.475 68.62,134.475 ; COMP10.2@69.64,137.075 68.67,137.075 68.26,136.665 68.26,134.835 68.62,134.475 ; COMP1.13@70.88,160.78 69.93,160.78 69.58,161.13 69.58,163.06 69.9,163.38 COMP1.9@70.88,163.38 ; COMP10.9@75.54,134.475 76.52,134.475 76.84,134.795 76.84,136.725 76.49,137.075 COMP10.13@75.54,137.075 ; 76.56,134.435 v1(77.63,134.435) ; COMP1.2@76.78,160.78 77.75,160.78 78.16,161.19 78.16,163.02 77.8,163.38 ; COMP1.6@76.78,163.38 77.8,163.38 ; v1@81.925,163.44 v1(78.51,163.44) 78.45,163.38 77.8,163.38 ; v1(90.4,134.45) v1@94.125,134.45 ; v1(94.17,134.495) 94.23,134.555 94.88,134.555 ; v1(95.2,163.45) 96.27,163.45 ; COMP9.6@95.9,134.555 94.88,134.555 ; COMP9.2@95.9,137.155 94.93,137.155 94.52,136.745 94.52,134.915 94.88,134.555 ; COMP2.13@97.29,160.81 96.34,160.81 95.99,161.16 95.99,163.09 96.31,163.41 COMP2.9@97.29,163.41 ; COMP9.9@101.8,134.555 102.78,134.555 103.1,134.875 103.1,136.805 102.75,137.155 COMP9.13@101.8,137.155 ; 102.82,134.515 v1(103.89,134.515) ; COMP2.2@103.19,160.81 104.16,160.81 104.57,161.22 104.57,163.05 104.21,163.41 ; COMP2.6@103.19,163.41 104.21,163.41 ; v1(108.225,163.47) v1(104.92,163.47) 104.86,163.41 104.21,163.41 ; v1(120.05,135.625) v1@123.15,135.625 ; v1(121.51,162.55) 122.58,162.55 ; v1(123.23,135.705) 123.29,135.765 123.94,135.765 ; COMP3.13@123.6,159.91 122.65,159.91 122.3,160.26 122.3,162.19 122.62,162.51 COMP3.9@123.6,162.51 ; COMP8.6@124.96,135.765 123.94,135.765 ; COMP8.2@124.96,138.365 123.99,138.365 123.58,137.955 123.58,136.125 123.94,135.765 ; COMP3.2@129.5,159.91 130.47,159.91 130.88,160.32 130.88,162.15 130.52,162.51 ; COMP3.6@129.5,162.51 130.52,162.51 ; COMP8.9@130.86,135.765 131.84,135.765 132.16,136.085 132.16,138.015 131.81,138.365 COMP8.13@130.86,138.365 ; 131.88,135.725 v1(132.95,135.725) ; v1@134.855,162.57 v1(131.23,162.57) 131.17,162.51 130.52,162.51 ; v1(146.275,134.7) v1@149.41,134.675 ; v1(149.54,134.805) 149.6,134.865 150.25,134.865 ; v1(150.57,163.76) 151.64,163.76 ; COMP7.6@151.27,134.865 150.25,134.865 ; COMP7.2@151.27,137.465 150.3,137.465 149.89,137.055 149.89,135.225 150.25,134.865 ; COMP4.13@152.66,161.12 151.71,161.12 151.36,161.47 151.36,163.4 151.68,163.72 COMP4.9@152.66,163.72 ; COMP7.9@157.17,134.865 158.15,134.865 158.47,135.185 158.47,137.115 158.12,137.465 COMP7.13@157.17,137.465 ; 158.19,134.825 v1(159.26,134.825) ; COMP4.2@158.56,161.12 159.53,161.12 159.94,161.53 159.94,163.36 159.58,163.72 ; COMP4.6@158.56,163.72 159.58,163.72 ; v1(163.975,163.75) 160.26,163.75 160.23,163.72 159.58,163.72 ; v1(172.75,134.835) v1(175.95,134.835) 176.01,134.895 176.66,134.895 ; v1(176.83,163.84) 177.9,163.84 ; COMP6.6@177.68,134.895 176.66,134.895 ; COMP6.2@177.68,137.495 176.71,137.495 176.3,137.085 176.3,135.255 176.66,134.895 ; COMP5.13@178.92,161.2 177.97,161.2 177.62,161.55 177.62,163.48 177.94,163.8 COMP5.9@178.92,163.8 ; COMP6.9@183.58,134.895 184.56,134.895 184.88,135.215 184.88,137.145 184.53,137.495 COMP6.13@183.58,137.495 ; 184.6,134.855 v1(185.67,134.855) ; COMP5.2@184.82,161.2 185.79,161.2 186.2,161.61 186.2,163.44 185.84,163.8 ; COMP5.6@184.82,163.8 185.84,163.8 ; v1(192.775,174.025) 198.505,179.755 S.3@203.095,179.755 ; v1(192.8,167.975) 192.75,167.975 188.635,163.86 v1(186.55,163.86) 186.49,163.8 185.84,163.8
  Bottom Layer w0.254: v1(63.75,163.5) 68.71,163.5 v1(68.79,163.42) 68.81,163.44 v1(78.51,163.44) ; v1(67.91,134.415) 77.61,134.415 v1(77.63,134.435) 77.63,141.13 v1(73.76,145) ; v1@77.645,134.45 v1(90.4,134.45) ; v1@81.925,163.45 v1(95.2,163.45) 95.22,163.47 v1(104.92,163.47) ; v1(94.17,134.495) 103.87,134.495 v1(103.89,134.515) 105.615,134.515 106.725,135.625 v1(120.05,135.625) ; v1(108.225,163.47) 117.63,163.47 118.55,162.55 v1(121.51,162.55) 121.53,162.57 v1(131.23,162.57) ; v1(123.23,135.705) 132.93,135.705 v1(132.95,135.725) 134.475,135.725 135.475,134.725 v1@146.25,134.725 ; v1(134.9,162.525) 146.625,162.525 147.86,163.76 v1(150.57,163.76) 150.59,163.78 v1(160.29,163.78) ; v1(149.54,134.805) 159.24,134.805 v1(159.26,134.825) ; v1@159.285,134.85 159.3,134.835 v1(172.75,134.835) ; v1(163.975,163.75) 164.065,163.84 v1(176.83,163.84) 176.85,163.86 v1(186.55,163.86) ; v1(175.95,134.835) 185.65,134.835 v1(185.67,134.855) ; v1(192.775,174.025) 192.8,174 v1(192.8,167.975)
  other v1: 81.925,163.475
VRAMP0: ADL1.8 C42.2 S.4 | length 4.9
  Top Layer w0.254: S.4@205.395,179.755 206.895,179.755 207.415,179.235 209.39,179.235 209.7,178.925 ADL1.8@209.7,178.65
pads on no net: ADL1.7 I1.c2 I1.c3 I1.c6 I1.c7 I1.c15 I1.c18 I1.c19 I1.c22 I1.c23 I1.d1 I1.d4 I1.d5 I1.d9 I1.d11 I1.d12 I1.d14 I1.d15 I1.d17 I1.d18 I1.d20 I1.d21 I1.d23 I1.d24 I1.d26 I1.d27 I1.d29 I1.d30 I1.d31 I1.d33 I1.d34 I1.g2 I1.g3 I1.h1 I1.h2 I1.h4 I1.h5 I1.h7 I1.h8 I1.h37 I1.h38 REG1.3

## Polygon pours and split planes (outlines as drawn)
GND on Top Layer "Top Layer-GND" (solid, remove dead copper, pour order 2): 223.67,110.69 223.67,185.97 207.215,202.425 61.245,202.425 51.775,192.955 51.775,105.825 61.92,95.68 208.66,95.68
GND on Bottom Layer "Bottom_GND" (solid, remove dead copper, pour order 3): 223.78,110.79 223.78,185.899 207.404,202.277 61.118,202.298 51.5,192.681 51.5,106.13 61.91,95.72 208.71,95.72

## Keep-outs
Keep-Out Layer:
  lines w0.254: 50.41,100.41 ccw(c56.09,100.41) 56.09,94.73 218.58,94.73 ccw(c218.58,100.97) 224.82,100.97 224.82,196.39 ccw(c217.93,196.39) 217.93,203.28 56.36,203.28 ccw(c56.36,197.33) 50.41,197.33 50.41,100.41

## Silkscreen, mask and mechanical layers (free items; w line width, h text height)
Top Overlay:
  text "Sameer" at 203.39,191.29 h1.52 r90
  text "Row" at 54.86,182.74 h1.52 r90
  text "SINAPSE" at 55.91,141.02 h3 r90
  text "Neuromorphic Engineering & Robotics" at 203.325,123.05 h1.52 r90
  text "160X160 Taxels" at 54.86,114.52 h1.52 r90
  text "Inderjot" at 202.97,98.88 h1.52 r90

## Dimensions
55.19,203.79 to 56.34,93.99 on Top Overlay
50.41,100.41 to 224.82,100.97 on Top Overlay

## Text inside footprints (layer, text, board x,y; h text height)
I1: Mechanical 14 "c" at 206.911,188.452 h1 r180; Mechanical 14 "d" at 205.535,188.469 h1 r180; Mechanical 14 "h" at 200.434,188.452 h1 r180; Mechanical 14 "g" at 201.759,188.342 h1 r180; Mechanical 14 "40" at 196.878,131.175 h1 r270; Mechanical 14 "1" at 195.917,183.897 h1 r180; Bottom Overlay "d" at 205.535,188.469 h1 r180; Bottom Overlay "c" at 206.911,188.452 h1 r180; Bottom Overlay "h" at 200.434,188.452 h1 r180; Bottom Overlay "g" at 201.759,188.342 h1 r180; Bottom Overlay "40" at 196.878,131.175 h1 r270; Bottom Overlay "1" at 195.917,183.897 h1 r180